# Altium PCB PCB3.pcbdoc (part 2 of 2)
Units mil, origin at the board's own origin, x right, y up, seen from the top; angles counter-clockwise.
Board outline 2519.61 x 1574.8 mil, 4 copper layers (Top Layer, Inner1, Inner2, Bottom Layer), stack 62.447 mil thick; 73 components, 68 nets, 329 pads, 85 vias.
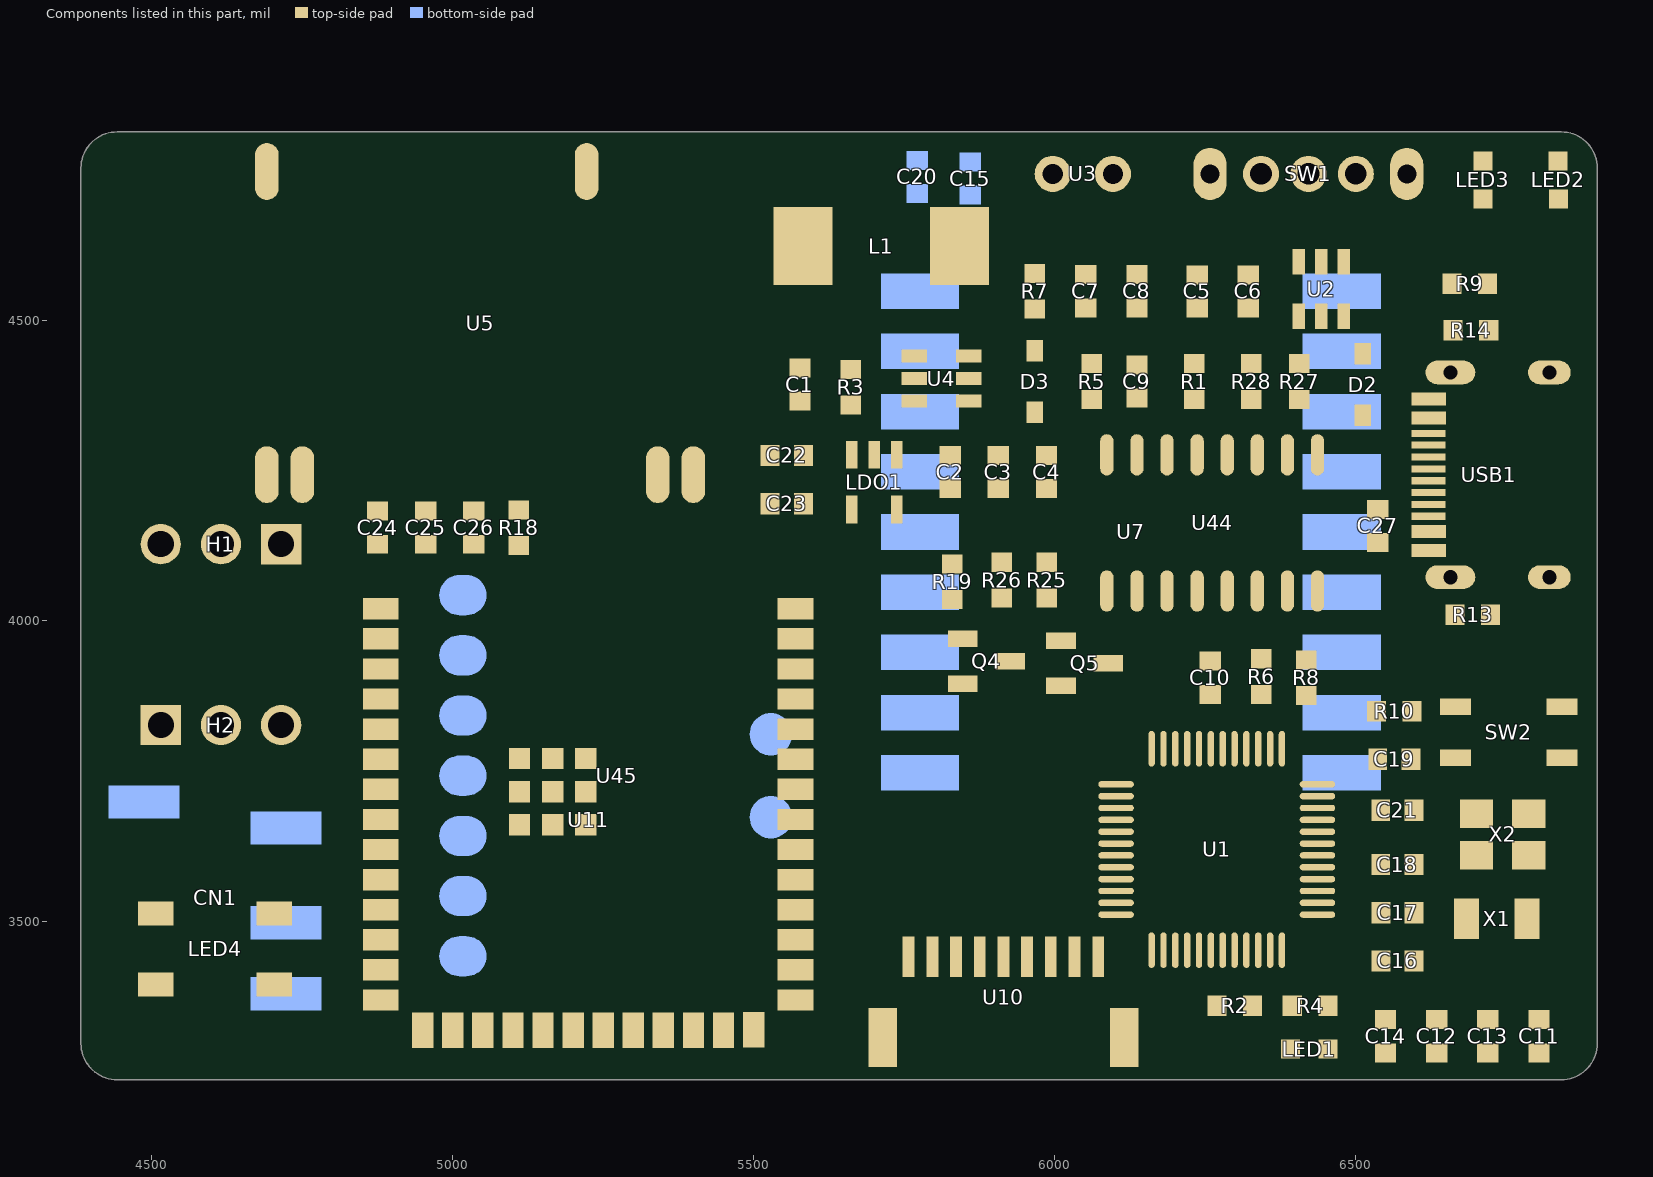
[diagram p4: the components of this part, seen from the top]

## Other copper
Top Layer:
  region net 5V: 5763.93,4261.24 5763.93,4291.24 ccw(c5808.93,6665.53) 5808.93,4290.82 5808.93,4259.32 ccw(c5763.93,3733.6)
  region net 3V3: 5926.3,4204.95 5926.3,4234.95 ccw(c5926.3,5450.18) 5968.93,4235.7 5968.93,4204.2 ccw(c5926.3,2989.71)
  region net ELEC: 6281.55,3862.07 6272.51,3856.96 ccw(c6256.6,3835.75) 6256.6,3862.27 6276.24,3877.98 ccw(c6302.76,3877.98)
  region net 3V3: 6742.28,3322.56 6742.28,3352.56 ccw(c6742.28,4706.54) 6787.28,3353.31 6787.28,3321.81 ccw(c6742.28,1968.58)
  region net 3V3: 6572.28,3322.56 6572.28,3352.56 ccw(c6572.28,4706.54) 6617.28,3353.31 6617.28,3321.81 ccw(c6572.28,1968.58)
  region net 3V3: 6697.72,3352.56 6697.72,3322.56 ccw(c6697.72,1968.58) 6652.72,3321.81 6652.72,3353.31 ccw(c6697.72,4706.54)
  region net 3V3: 6657.28,3322.56 6657.28,3352.56 ccw(c6657.28,4706.54) 6702.28,3353.31 6702.28,3321.81 ccw(c6657.28,1968.58)
  region net 3V3: 6782.72,3352.56 6782.72,3322.56 ccw(c6782.72,1968.58) 6737.72,3321.81 6737.72,3353.31 ccw(c6782.72,4706.54)
  region net 3V3: 6612.72,3352.56 6612.72,3322.56 ccw(c6612.72,1968.58) 6567.72,3321.81 6567.72,3353.31 ccw(c6612.72,4706.54)
  region net OSC32IN: 6563.49,3421.02 6558.39,3411.98 ccw(c6542.48,3390.77) 6542.48,3417.28 6558.19,3436.93 ccw(c6584.7,3436.93)
  region net OSC32IN: 6525,3430 6525,3440 ccw(c6509.22,3447.5) 6526.69,3447.5 6526.69,3422.5 ccw(c6509.22,3422.5)
  region net OSC32OT: 6521.39,3533.79 6531.3,3538.02 ccw(c6547.21,3559.23) 6547.21,3532.72 6526.69,3517.88 ccw(c6500.18,3517.88)
  region net OSC32OT: 6563.49,3501.02 6558.39,3491.98 ccw(c6542.48,3470.77) 6542.48,3497.28 6558.19,3516.93 ccw(c6584.7,3516.93)
  region net OSCIN: 6511.23,3585.75 6511.23,3595.75 ccw(c6511.23,3614.5) 6526.23,3603.25 6526.23,3578.25 ccw(c6511.23,3567)
  region net OSCIN: 6557.92,3618.3 6563.03,3609.26 ccw(c6584.24,3593.35) 6557.72,3593.35 6542.01,3612.99 ccw(c6542.01,3639.51)
  region net RST32: 6521.03,3747.26 6515.92,3756.3 ccw(c6494.71,3772.21) 6521.23,3772.21 6536.94,3752.56 ccw(c6536.94,3726.04)
  region net RST32: 6529.88,3802.99 6539.88,3802.99 ccw(c6558.63,3802.99) 6547.38,3787.99 6522.38,3787.99 ccw(c6511.13,3802.99)
  region net RST32: 6558.03,3756.3 6552.92,3747.26 ccw(c6537.01,3726.04) 6537.01,3752.56 6552.72,3772.21 ccw(c6579.24,3772.21)
  region net OSCOT: 6563.03,3671.3 6557.92,3662.26 ccw(c6542.01,3641.04) 6542.01,3667.56 6557.72,3687.21 ccw(c6584.24,3687.21)
  region net OSCOT: 6546.98,3666.98 6536.98,3666.98 ccw(c6529.48,3619.12) 6529.48,3667.56 6554.48,3667.56 ccw(c6554.48,3619.12)
  region net 3V3: 5494.78,4304.01 5514.02,4327.19 ccw(c5735.24,4484.77) 5543.19,4292.72 5511.69,4257.28 ccw(c5438.7,4257.28)
  region net 3V3: 5542.44,4212.28 5512.44,4212.28 ccw(c4158.46,4212.28) 5511.69,4257.28 5543.19,4257.28 ccw(c6896.42,4212.28)
  region net 3V3: 5512.44,4257.72 5542.44,4257.72 ccw(c6896.42,4257.72) 5543.19,4212.72 5511.69,4212.72 ccw(c4158.46,4257.72)
  region net RST: 5040,4096.69 5030,4096.69 ccw(c5011.25,4096.69) 5022.5,4111.69 5047.5,4111.69 ccw(c5058.75,4096.69)
  region net RST: 5067.72,4132.44 5067.72,4122.44 ccw(c5067.72,4103.69) 5052.72,4114.94 5052.72,4139.94 ccw(c5067.72,4151.19)
  region net 5V: 6568.82,4119.54 6547.61,4098.33 ccw(c6503.81,4054.53) 6519.14,4114.55 6554.58,4146.04 ccw(c6605.76,4156.48)
  region net $1N3930: 6501.86,4395.37 6531.86,4395.37 ccw(c6632.82,4359.39) 6525.64,4359.39 6498.08,4359.39 ccw(c6328.68,4395.37)
  region net VBUS: 6544.37,4459.03 6544.37,4429.03 ccw(c6544.37,4363.08) 6525.64,4426.32 6525.64,4461.75 ccw(c6544.37,4524.98)
  region net SD: 4683.14,4088.89 4676.07,4095.96 ccw(c4654.86,4111.87) 4681.37,4111.87 4699.05,4094.19 ccw(c4699.05,4067.67)
  region net WS: 4650.74,3798.2 4643.66,3791.13 4641.74,3792.89 4639.92,3794.23 4638.19,3795.21 4636.51,3795.85 4634.87,3796.22 4633.25,3796.33 4631.62,3796.25 4629.97,3796.01 4626.48,3795.23 4622.6,3794.34 4618.17,3793.68 4615.69,3793.54 4613,3793.59 4648.27,3828.86 4648.32,3826.17 4648.18,3823.69 4647.52,3819.26 4646.63,3815.39 4645.85,3811.89 4645.61,3810.24 4645.53,3808.61 4645.65,3806.99 4646.01,3805.35 4646.65,3803.67 4647.63,3801.94 4648.97,3800.12
  region net SCK: 4743.66,3862.87 4750.74,3855.8 4748.97,3853.88 4747.63,3852.06 4746.65,3850.33 4746.01,3848.65 4745.65,3847.01 4745.53,3845.39 4745.61,3843.76 4745.85,3842.11 4746.63,3838.61 4747.52,3834.74 4748.18,3830.31 4748.32,3827.83 4748.27,3825.14 4713,3860.41 4715.69,3860.46 4718.17,3860.32 4722.6,3859.66 4726.48,3858.77 4729.97,3857.99 4731.62,3857.75 4733.25,3857.67 4734.87,3857.78 4736.51,3858.15 4738.19,3858.79 4739.92,3859.77 4741.74,3861.11
  region net 5V: 5792.45,4291.24 5792.45,4261.24 ccw(c5792.45,4127.14) 5747.45,4253.47 5747.45,4299.02 ccw(c5792.45,4425.35)
  region net $1N3871: 6366.44,3315.96 6384.38,3312.16 ccw(c6406.46,3334.24) 6397.7,3304.27 6375.96,3304.27 ccw(c6314.03,3263.55)
  region net WSDIN: 4747.95,3519.05 4747.95,3509.05 ccw(c4747.95,3490.3) 4732.95,3501.55 4732.95,3526.55 ccw(c4747.95,3537.8)
  region net $1N5117: 5862.09,3991.92 5880.83,3996.52 ccw(c5911.72,3965.63) 5872.1,3984.03 5848.77,3984.03 ccw(c5840.01,4014)
  region net DTR: 5807.88,3890.45 5807.88,3900.45 ccw(c5807.88,3919.2) 5822.88,3907.95 5822.88,3882.95 ccw(c5807.88,3871.7)
  region net IO0: 5886.62,3930 5886.62,3940 ccw(c5886.62,3960.28) 5901.62,3946.63 5901.62,3922.5 ccw(c5886.62,3911.25)
  region net $1N5118: 6005.63,3996.18 6015.63,3996.18 ccw(c6034.38,3996.18) 6023.13,3981.18 5998.13,3981.18 ccw(c5986.88,3996.18)
  region net RTS: 5990.6,3919.7 6010.17,3914.27 ccw(c6032.25,3936.35) 6023.49,3906.38 5998.49,3906.38 ccw(c5968.52,3897.62)
  region net RTS: 6050.24,3897.6 6050.24,3887.6 ccw(c6050.24,3868.85) 6035.24,3880.1 6035.24,3905.1 ccw(c6050.24,3916.35)
  region net RST: 6059.46,3948.47 6072.99,3949.08 ccw(c6088.9,3970.3) 6088.9,3943.78 6064.76,3932.56 ccw(c6038.25,3932.56)
  region net LED: 6239,3355 6239,3365 ccw(c6239,3383.75) 6254,3372.5 6254,3347.5 ccw(c6239,3336.25)
  region net $1N3871: 6350.37,3346.17 6344.44,3337.96 ccw(c6328.53,3316.75) 6328.53,3343.27 6345.07,3362.08 ccw(c6371.59,3362.08)
  region net $1N3986: 5676.65,4297.65 5646.65,4297.65 ccw(c5141.41,4297.65) 5644.64,4342.65 5678.66,4342.65 ccw(c6181.89,4297.65)
  region net 5V: 5682.29,4459.71 5704.64,4439.63 ccw(c5794.32,4349.95) 5678.66,4401.97 5644.64,4433.72 ccw(c5592.62,4549.38)
  region net BOOT0: 6373.7,3374.38 6379.64,3382.59 ccw(c6395.55,3403.8) 6395.55,3377.28 6379,3358.47 ccw(c6352.48,3358.47)
  region net GND: 6433.02,3370.98 6435.56,3382.59 ccw(c6451.47,3403.8) 6451.47,3377.28 6438.32,3355.07 ccw(c6411.8,3355.07)
  region net ELEC: 6329.56,3856.76 6321.35,3862.7 ccw(c6300.14,3878.61) 6326.66,3878.61 6345.47,3862.06 ccw(c6345.47,3835.55)
  region net ELEC: 6375.67,3882.94 6375.67,3872.94 ccw(c6375.67,3854.19) 6360.67,3865.44 6360.67,3890.44 ccw(c6375.67,3901.69)
  region net ELEC: 6386.52,3872.94 6386.52,3882.94 ccw(c6386.52,3901.69) 6401.52,3890.44 6401.52,3865.44 ccw(c6386.52,3854.19)
  region net RST32: 6539.88,3818.27 6529.88,3818.27 ccw(c6511.13,3818.27) 6522.38,3833.27 6547.38,3833.27 ccw(c6558.63,3818.27)
  region net $1N3927: 6719.66,4042.01 6729.66,4042.01 ccw(c6748.41,4042.01) 6737.16,4027.01 6712.16,4027.01 ccw(c6700.91,4042.01)
  region net $1N3925: 6726.52,4450.85 6716.52,4450.85 ccw(c6697.77,4450.85) 6709.02,4465.85 6734.02,4465.85 ccw(c6745.27,4450.85)
  region net RST: 5077.99,4122.44 5077.99,4132.44 ccw(c5077.99,4151.19) 5092.99,4139.94 5092.99,4114.94 ccw(c5077.99,4103.69)
  region net RST: 5142.01,4130.34 5142.01,4120.34 ccw(c5142.01,4101.59) 5127.01,4112.84 5127.01,4137.84 ccw(c5142.01,4149.09)
  region net IO0: 5815.89,4014.16 5807.69,4020.1 ccw(c5786.48,4036.01) 5812.99,4036.01 5831.8,4019.46 ccw(c5831.8,3992.95)
  region net DTR: 5964.55,4112.75 5972.75,4118.69 ccw(c5988.66,4139.9) 5988.66,4113.39 5969.85,4096.84 ccw(c5943.34,4096.84)
  region net $1N5118: 6009.17,4022.95 6000.97,4017.01 ccw(c5985.06,3995.8) 5985.06,4022.32 6003.87,4038.86 ccw(c6030.38,4038.86)
  region net RTS: 5934.17,4082.27 5925.97,4076.33 ccw(c5910.06,4055.12) 5910.06,4081.64 5928.87,4098.18 ccw(c5955.38,4098.18)
  region net $1N5117: 5901.32,4017.01 5889.55,4019.38 ccw(c5868.34,4035.29) 5894.85,4035.29 5917.23,4022.32 ccw(c5917.23,3995.8)
  region net $1N4934: 6392.75,4347.01 6384.55,4352.95 ccw(c6363.34,4368.86) 6389.85,4368.86 6408.66,4352.32 ccw(c6408.66,4325.8)
  region net $1N4935: 6341.86,4337.32 6331.86,4337.32 ccw(c6313.11,4337.32) 6324.36,4352.32 6343.87,4352.32 ccw(c6398.89,4337.32)
  region net RST32: 6651.35,3751.28 6632.13,3746.19 ccw(c6607.21,3771.11) 6640.36,3759.17 6664.67,3759.17 ccw(c6673.43,3729.2)
  region net 3V3: 6397.64,3667.88 6397.64,3677.88 6400.4,3677.74 6403.01,3677.4 6407.58,3676.34 6410.93,3675.28 6412.64,3674.8 6412.64,3664.17 6410.93,3664.75 6407.58,3666.02 6405.42,3666.7 6403.01,3667.3 6400.4,3667.72
  region net BT-RX: 6397.64,3723.55 6397.64,3733.55 6407.58,3733.7 6412.64,3733.86 6412.64,3723.23 6407.58,3723.39
  region net ELEC: 6274.38,3826.81 6284.38,3826.81 6284.53,3816.87 6284.69,3811.81 6274.06,3811.81 6274.22,3816.87
  region net 3V3: 6166.6,3748.38 6156.6,3748.38 6156.5,3753.75 6156.28,3758.32 6155.95,3763.38 6166.58,3763.38
  region net SWDO: 6063,3549.77 6063,3559.77 6065.76,3559.63 6068.37,3559.29 6072.94,3558.23 6076.29,3557.17 6078,3556.69 6078,3546.06 6076.29,3546.64 6072.94,3547.91 6070.78,3548.59 6068.37,3549.19 6065.76,3549.61
  region net 3V3: 6137.84,3527.13 6139.59,3514.74 6136.64,3511.78 6135.16,3510.42 6133.64,3509.21 6132.03,3508.18 6130.32,3507.38 6128.46,3506.87 6126.43,3506.69 6126.43,3517.32 6128.71,3517.54 6130.45,3518.16 6131.79,3519.13 6132.89,3520.38 6134.96,3523.53 6136.22,3525.3
  region net SCLK: 6166.27,3413.74 6156.27,3413.74 6156.11,3423.68 6155.95,3428.74 6166.58,3428.74 6166.42,3423.68
  region net LED: 6205.64,3413.74 6195.64,3413.74 6195.48,3423.68 6195.32,3428.74 6205.95,3428.74 6205.79,3423.68
  region net BOOT0: 6304.07,3415.93 6294.07,3415.93 6293.91,3424.37 6293.75,3428.74 6304.38,3428.74 6304.22,3424.37
  region net GND: 6366.51,3421.99 6356.51,3421.99 6356.35,3423.21 6355.93,3424.33 6355.33,3425.35 6354.65,3426.26 6353.38,3427.74 6352.96,3428.3 6352.8,3428.74 6363.43,3428.74 6363.56,3428.3 6363.91,3427.74 6364.97,3426.26 6366.03,3424.33 6366.37,3423.21
  region net 3V3: 6362.69,3488.58 6375.07,3490.33 6378.03,3487.38 6379.39,3485.9 6380.61,3484.38 6381.63,3482.77 6382.43,3481.06 6382.94,3479.2 6383.12,3477.17 6372.49,3477.17 6372.27,3479.45 6371.65,3481.19 6370.68,3482.53 6369.43,3483.63 6366.29,3485.7 6364.51,3486.96
  region net 3V3: 5364.19,4330.4 5385.4,4309.19 ccw(c5463.51,4231.08) 5360.35,4270.59 5340.67,4290.28 ccw(c5275.55,4355.4)
  region net TX1: 5909.99,3490.39 5919.99,3490.39 ccw(c5945.65,3490.39) 5924.84,3475.39 5905.15,3475.39 ccw(c5884.34,3490.39)
  region net RX1: 5870.62,3490.39 5880.62,3490.39 ccw(c5906.28,3490.39) 5885.47,3475.39 5865.78,3475.39 ccw(c5844.97,3490.39)
  region net SWDO: 5791.89,3490.39 5801.89,3490.39 ccw(c5827.54,3490.39) 5806.73,3475.39 5787.04,3475.39 ccw(c5766.23,3490.39)
  region net SCLK: 5841.26,3403.74 5831.26,3403.74 ccw(c5826.41,3403.62) 5826.41,3408.47 5846.1,3408.47 ccw(c5846.1,3403.62)
  region net $1N4934: 6381.86,4314.27 6391.86,4314.27 6392.12,4311.51 6392.8,4308.9 6393.77,4306.49 6394.87,4304.33 6396.94,4300.98 6397.62,4299.89 6397.88,4299.27 6375.84,4299.27 6376.1,4299.89 6376.78,4300.98 6378.85,4304.33 6379.95,4306.49 6380.92,4308.9 6381.6,4311.51
  region net $1N4935: 6331.86,4314.27 6341.86,4314.27 6342.12,4311.51 6342.8,4308.9 6343.77,4306.49 6344.87,4304.33 6346.94,4300.98 6347.62,4299.89 6347.88,4299.27 6325.84,4299.27 6326.1,4299.89 6326.78,4300.98 6328.85,4304.33 6329.95,4306.49 6330.92,4308.9 6331.6,4311.51
  region net USB_D+: 6240,4235.76 6230,4239.48 6229.77,4242.04 6229.19,4244.02 6228.39,4245.62 6227.51,4247.02 6226.69,4248.41 6226.07,4250 6225.79,4251.95 6225.99,4254.48 6247.73,4250.76 6247.4,4249.31 6246.98,4248.07 6245.92,4246.09 6244.66,4244.58 6243.33,4243.3 6242.07,4242.02 6241.01,4240.49 6240.59,4239.56 6240.27,4238.48 6240.07,4237.22
  region net USB_D-: 6190,4235.76 6180,4239.48 6179.77,4242.04 6179.19,4244.02 6178.39,4245.62 6177.51,4247.02 6176.69,4248.41 6176.07,4250 6175.79,4251.95 6175.99,4254.48 6197.73,4250.76 6197.4,4249.31 6196.98,4248.07 6195.92,4246.09 6194.66,4244.58 6193.33,4243.3 6192.07,4242.02 6191.01,4240.49 6190.59,4239.56 6190.27,4238.48 6190.07,4237.22
  region net 5V: 6464.23,4098.34 6473.14,4064.82 6468.43,4060.28 6463.86,4056.01 6459.6,4051.84 6455.77,4047.59 6454.08,4045.39 6452.54,4043.1 6451.2,4040.71 6450.05,4038.19 6449.13,4035.53 6448.45,4032.69 6448.03,4029.67 6447.88,4026.44 6425.84,4073.09 6425.92,4074.33 6426.16,4075.5 6426.56,4076.62 6427.09,4077.68 6428.56,4079.64 6430.49,4081.41 6432.81,4083.03 6435.45,4084.51 6438.35,4085.9 6441.43,4087.21 6447.86,4089.71 6454.18,4092.26 6457.12,4093.61 6459.82,4095.06 6462.21,4096.63
  region net RTS: 6341.86,4011.44 6331.86,4011.44 6331.6,4014.19 6330.92,4016.8 6329.95,4019.21 6328.85,4021.37 6326.78,4024.73 6326.1,4025.81 6325.84,4026.44 6347.88,4026.44 6347.62,4025.81 6346.94,4024.73 6344.87,4021.37 6343.77,4019.21 6342.8,4016.8 6342.12,4014.19
  region net DTR: 6267.94,4066.06 6264.84,4083.31 6266.84,4081.04 6268.8,4078.42 6272.33,4073.39 6273.76,4071.62 6274.35,4071.06 6274.86,4070.77 6275.28,4070.79 6275.58,4071.16 6275.77,4071.91 6275.84,4073.09 6275.84,4052.74 6275.66,4054.75 6275.16,4056.62 6274.38,4058.36 6273.37,4060.01 6272.18,4061.58 6270.84,4063.1
  region net $1N3927: 6665,4198.64 6665,4188.64 ccw(c6665,4063.95) 6650,4187.74 6650,4199.55 ccw(c6665,4323.34)
  region net USB_D-: 6587.07,4207.93 6587.07,4217.93 ccw(c6587.07,4231.69) 6592.91,4219.23 6592.91,4207.42 ccw(c6587.07,4174.35)
  region net USB_D+: 6662.93,4237.93 6662.93,4227.93 ccw(c6662.93,4125.7) 6650,4227.11 6650,4238.92 ccw(c6662.93,4322.94)
  region net USB_D+: 6662.62,4277.38 6662.62,4267.38 ccw(c6662.62,4178.97) 6650,4266.48 6650,4278.29 ccw(c6662.62,4365.8)
  region net $1N3925: 6665,4316.75 6665,4306.75 ccw(c6665,4182.06) 6650,4305.85 6650,4317.66 ccw(c6665,4441.45)
  region net OSC32IN: 6750.74,3464.21 6756.17,3483.79 ccw(c6734.09,3505.86) 6764.07,3497.11 6764.07,3472.11 ccw(c6772.82,3442.13)
  region net OSCIN: 6658.67,3625 6658.67,3635 ccw(c6673.67,3838.53) 6673.67,3634.45 6673.67,3617.5 ccw(c6658.67,3606.25)
  region net OSCOT: 6754.98,3705.52 6765.99,3708.65 ccw(c6781.9,3729.86) 6781.9,3703.35 6760.28,3689.61 ccw(c6733.76,3689.61)
  region net RST: 4909.24,3943.21 4915.34,3935.18 ccw(c4936.55,3919.27) 4910.04,3919.27 4893.33,3937.91 ccw(c4893.33,3964.43)
  region net SCK: 4835.98,3865.2 4835.98,3875.2 ccw(c4835.98,3893.95) 4850.98,3882.7 4850.98,3857.7 ccw(c4835.98,3846.45)
  region net WS: 4835.98,3815.2 4835.98,3825.2 ccw(c4835.98,3843.95) 4850.98,3832.7 4850.98,3807.7 ccw(c4835.98,3796.45)
  region net SD: 4850.42,3747.18 4845.68,3756.58 ccw(c4824.47,3772.49) 4850.98,3772.49 4866.33,3752.48 ccw(c4866.33,3725.96)
  region net DIN: 4925.04,3675.2 4925.04,3665.2 ccw(c4925.04,3646.45) 4910.04,3657.7 4910.04,3682.7 ccw(c4925.04,3693.95)
  region net BCLK: 4925.04,3625.2 4925.04,3615.2 ccw(c4925.04,3596.45) 4910.04,3607.7 4910.04,3632.7 ccw(c4925.04,3643.95)
  region net LRC: 4917.93,3563.28 4922.92,3544.15 ccw(c4897.08,3518.31) 4910.04,3552.48 4910.04,3576.6 ccw(c4940.01,3585.36)
  region net WSDIN: 4835.98,3509.05 4835.98,3519.05 ccw(c4835.98,3537.8) 4850.98,3526.55 4850.98,3502.48 ccw(c4835.98,3488.64)
  region net AI1: 5614.02,3475.2 5614.02,3465.2 ccw(c5614.02,3446.45) 5599.02,3457.7 5599.02,3482.7 ccw(c5614.02,3493.95)
  region net AI2: 5614.02,3525.2 5614.02,3515.2 ccw(c5614.02,3496.45) 5599.02,3507.7 5599.02,3532.7 ccw(c5614.02,3543.95)
  region net AI3: 5614.02,3675.2 5614.02,3665.2 ccw(c5614.02,3646.45) 5599.02,3657.7 5599.02,3682.7 ccw(c5614.02,3693.95)
  region net AI4: 5614.02,3723.86 5614.02,3713.86 ccw(c5614.02,3695.11) 5599.02,3706.36 5599.02,3731.36 ccw(c5614.02,3742.61)
  region net AI5: 5614.02,3775.2 5614.02,3765.2 ccw(c5614.02,3746.45) 5599.02,3757.7 5599.02,3782.7 ccw(c5614.02,3793.95)
  region net TX1: 5919.99,3503.59 5909.99,3503.59 5909.91,3504.71 5909.66,3505.84 5908.76,3508.07 5907.5,3510.17 5906.04,3511.99 5923.95,3511.99 5922.49,3510.17 5921.23,3508.07 5920.33,3505.84 5920.08,3504.71
  region net RX1: 5880.62,3483.59 5870.62,3483.59 5870.54,3484.71 5870.29,3485.84 5869.39,3488.07 5868.13,3490.17 5866.67,3491.99 5884.58,3491.99 5883.12,3490.17 5881.86,3488.07 5880.96,3485.84 5880.71,3484.71
  region net RX1: 5951.41,3615 5951.41,3605 5950.29,3604.91 5949.16,3604.66 5946.93,3603.77 5944.83,3602.5 5943.01,3601.05 5943.01,3618.95 5944.83,3617.5 5946.93,3616.23 5949.16,3615.34 5950.29,3615.09
  region net DIN: 5001.76,3651.17 5009.04,3658.03 5009.9,3657.3 5010.87,3656.67 5013.06,3655.72 5015.42,3655.12 5017.73,3654.83 5004.86,3642.39 5004.62,3644.71 5004.05,3647.1 5003.11,3649.33 5002.49,3650.31
  region net BCLK: 4999.86,3548.07 5006.93,3555.14 5007.79,3554.41 5008.76,3553.79 5010.98,3552.84 5013.35,3552.26 5015.67,3551.99 5003.01,3539.33 5002.74,3541.65 5002.16,3544.02 5001.21,3546.24 5000.59,3547.21
  region net LRC: 5010,3459.14 5020,3459.14 5020.09,3458.12 5020.34,3457.24 5020.73,3456.48 5021.23,3455.79 5023.95,3453.01 5006.05,3453.01 5008.77,3455.79 5009.27,3456.48 5009.66,3457.24 5009.91,3458.12
  region net DTR: 6101.41,4110 6101.41,4100 6100.29,4099.91 6099.16,4099.66 6096.93,4098.77 6094.83,4097.5 6093.01,4096.05 6093.01,4113.95 6094.83,4112.5 6096.93,4111.23 6099.16,4110.34 6100.29,4110.09
  region net BT-RX: 6396.41,3733.55 6396.41,3723.55 6395.29,3723.46 6394.16,3723.21 6391.93,3722.31 6389.83,3721.05 6388.01,3719.6 6388.01,3737.5 6389.83,3736.05 6391.93,3734.78 6394.16,3733.89 6395.29,3733.63
  region net 3V3: 6329.99,3535.41 6322.92,3528.34 6322.06,3529.07 6321.09,3529.7 6318.88,3530.64 6316.5,3531.23 6314.18,3531.49 6326.84,3544.15 6327.11,3541.83 6327.69,3539.46 6328.64,3537.25 6329.26,3536.27
  region net 3V3: 6298.19,3538.82 6298.7,3548.82 6299.82,3548.91 6300.94,3549.15 6303.16,3550.02 6305.25,3551.25 6307.1,3552.65 6306.6,3534.76 6304.8,3536.25 6302.7,3537.55 6300.45,3538.47 6299.31,3538.73
  region net 3V3: 6309.85,3559.89 6319.85,3559.89 6319.94,3558.77 6320.19,3557.64 6321.09,3555.41 6322.35,3553.32 6323.8,3551.49 6305.9,3551.49 6307.35,3553.32 6308.62,3555.41 6309.51,3557.64 6309.76,3558.77
  region net 3V3: 5941.88,4234.95 5934.7,4204.95 5932.29,4205.08 5930.42,4205.28 5928.6,4205.25 5926.3,4204.68 5933.47,4220.65 5933.77,4220.22 5934.1,4220.23 5934.47,4220.64 5934.87,4221.37 5935.77,4223.6 5936.78,4226.46 5937.91,4229.48 5939.14,4232.21 5939.79,4233.32 5940.47,4234.19 5941.16,4234.75
  region net IO0: 5908.35,3930 5911.55,3940 5913.75,3940.27 5915.91,3940.97 5917.99,3941.96 5919.95,3943.09 5916.75,3925.48 5915.1,3927.14 5912.97,3928.59 5910.62,3929.61 5909.46,3929.9
  region net ELEC: 6254.99,3874.48 cw(c6201.78,3825.1) 6274.38,3825.1 6284.38,3822.17 cw(c6314.38,3822.17) 6314.38,3852.17 6311.45,3862.17 cw(c6311.45,3934.77) 6262.06,3881.55
  region net 3V3: 6196.6,3548.82 cw(c6196.6,3578.82) 6166.6,3578.82 6156.6,3575.89 cw(c6084.18,3575.89) 6135.39,3524.68 6142.46,3517.61 cw(c6193.67,3466.39) 6193.67,3538.82
Inner1:
  region net BT-RX: 4758.02,4248.03 4758.02,4238.03 4756.9,4237.94 4755.77,4237.69 4753.54,4236.8 4751.44,4235.53 4749.62,4234.08 4749.62,4251.98 4751.44,4250.53 4753.54,4249.27 4755.77,4248.37 4756.9,4248.12
  region net BT-TX: 4683.07,4260.14 4690.14,4253.07 4689.41,4252.21 4688.79,4251.24 4687.84,4249.02 4687.26,4246.65 4686.99,4244.33 4674.33,4256.99 4676.65,4257.26 4679.02,4257.84 4681.24,4258.79 4682.21,4259.41
  region net BT-TX: 6382.81,3826.64 6392.81,3826.64 6392.89,3825.51 6393.14,3824.38 6394.04,3822.15 6395.31,3820.06 6396.76,3818.23 6378.86,3818.23 6380.31,3820.06 6381.57,3822.15 6382.47,3824.38 6382.72,3825.51
  region net BT-RX: 6363.59,3723.55 6363.59,3733.55 6364.71,3733.63 6365.84,3733.89 6368.07,3734.78 6370.17,3736.05 6371.99,3737.5 6371.99,3719.6 6370.17,3721.05 6368.07,3722.31 6365.84,3723.21 6364.71,3723.46
  region net TXD: 6342,4403.84 6334.93,4396.77 6334.07,4397.5 6333.1,4398.12 6330.88,4399.07 6328.51,4399.65 6326.19,4399.92 6338.85,4412.58 6339.12,4410.26 6339.7,4407.89 6340.65,4405.68 6341.27,4404.7
  region net RXD: 6410.51,4401.73 6403.44,4394.66 6402.59,4395.39 6401.61,4396.01 6399.4,4396.96 6397.02,4397.54 6394.71,4397.81 6407.36,4410.46 6407.63,4408.15 6408.22,4405.77 6409.16,4403.56 6409.78,4402.58
  region net TXD: 5603.07,3875.14 5610.14,3868.07 5609.41,3867.21 5608.79,3866.24 5607.84,3864.02 5607.26,3861.65 5606.99,3859.33 5594.33,3871.99 5596.65,3872.26 5599.02,3872.84 5601.24,3873.79 5602.21,3874.41
  region net RXD: 5603.45,3825 5603.45,3815 5602.32,3814.91 5601.19,3814.66 5598.96,3813.77 5596.87,3812.5 5595.04,3811.05 5595.04,3828.95 5596.87,3827.5 5598.96,3826.23 5601.19,3825.34 5602.32,3825.09
  region net AS-RXD: 5639.86,3984.86 5632.79,3991.93 5633.52,3992.79 5634.14,3993.76 5635.09,3995.98 5635.67,3998.35 5635.94,4000.67 5648.6,3988.01 5646.28,3987.74 5643.9,3987.16 5641.69,3986.21 5640.72,3985.59
  region net AS-TXD: 5496.93,3989.86 5489.86,3996.93 5490.59,3997.79 5491.21,3998.76 5492.16,4000.98 5492.74,4003.35 5493.01,4005.67 5505.67,3993.01 5503.35,3992.74 5500.98,3992.16 5498.76,3991.21 5497.79,3990.59
  region net AS-RXD: 5973.59,3450 5973.59,3460 5974.71,3460.09 5975.84,3460.34 5978.07,3461.23 5980.17,3462.5 5981.99,3463.95 5981.99,3446.05 5980.17,3447.5 5978.07,3448.77 5975.84,3449.66 5974.71,3449.91
  region net AS-TXD: 5948.54,3396.46 5941.46,3403.54 5942.13,3404.32 5942.57,3405.12 5942.83,3405.93 5942.96,3406.78 5943.01,3410.67 5955.67,3398.01 5951.78,3397.96 5950.93,3397.83 5950.12,3397.57 5949.32,3397.13
Inner2:
  region net BAT: 6358.12,4701.85 6328.12,4701.85 6327.98,4704.39 6327.57,4707.16 6326.91,4710.05 6326.04,4712.96 6324.96,4715.8 6323.71,4718.46 6322.3,4720.85 6320.76,4722.85 6365.48,4722.85 6363.94,4720.85 6362.53,4718.46 6361.28,4715.8 6360.2,4712.96 6359.33,4710.05 6358.67,4707.16 6358.26,4704.39
  region net BAT: 6111.86,4701.85 6081.86,4701.85 6081.72,4704.39 6081.31,4707.16 6080.65,4710.05 6079.78,4712.96 6078.7,4715.8 6077.45,4718.46 6076.04,4720.85 6074.5,4722.85 6119.22,4722.85 6117.68,4720.85 6116.27,4718.46 6115.02,4715.8 6113.94,4712.96 6113.07,4710.05 6112.41,4707.16 6112,4704.39
  region net BAT: 6241.66,4591.75 6264.23,4571.9 6263.43,4571.37 6262.49,4571.17 6261.42,4571.25 6260.26,4571.56 6257.77,4572.68 6255.23,4574.12 6252.88,4575.49 6250.92,4576.38 6250.16,4576.53 6249.58,4576.41 6249.21,4575.97 6249.08,4575.16 6234.57,4586.95 6236.61,4587.66 6238.42,4588.8 6240.07,4590.2
  region net BAT: 6328.12,4742.85 cw(c6105.86,4773.19) 6264.48,4614.58 6279.48,4587.15 cw(c6344.41,4522.22) 6395.16,4598.75 6416.37,4619.96 cw(c6559.45,4763.04) 6358.12,4742.85
Bottom Layer:
  region net $1N3970: 5865,4676.69 5855,4676.69 ccw(c5836.25,4676.69) 5847.5,4691.69 5872.5,4691.69 ccw(c5883.75,4676.69)
  region net SPK-: 4491.89,3656.89 4481.89,3656.89 ccw(c4463.14,3656.89) 4474.39,3671.89 4499.39,3671.89 ccw(c4510.64,3656.89)
  region net MIC+: 4751.49,3691.59 4771.06,3697.02 ccw(c4793.14,3674.94) 4763.17,3683.7 4738.17,3683.7 ccw(c4729.41,3713.67)
  region net SPK+: 4751.49,3534.11 4771.06,3539.54 ccw(c4793.14,3517.46) 4763.17,3526.22 4738.17,3526.22 ccw(c4729.41,3556.19)
  region net MIC-: 4797.16,3385.55 4797.16,3375.55 ccw(c4797.16,3356.8) 4782.16,3368.05 4782.16,3393.05 ccw(c4797.16,3404.3)
  region net AS-TXD: 5696.51,4342.85 5696.51,4352.85 ccw(c5696.51,4371.6) 5711.51,4360.35 5711.51,4335.35 ccw(c5696.51,4324.1)
  region net AS-RXD: 5696.51,4242.85 5696.51,4252.85 ccw(c5696.51,4271.6) 5711.51,4260.35 5711.51,4235.35 ccw(c5696.51,4224.1)
  region net MIC+: 5730.79,3886.46 5746.12,3885.27 ccw(c5768.2,3907.35) 5759.44,3877.38 5734.44,3877.38 ccw(c5721.96,3877.63)
  region net MIC-: 5746.12,3710.43 5726.55,3705 ccw(c5704.47,3727.08) 5734.44,3718.33 5759.44,3718.33 ccw(c5768.2,3688.35)
  region net TX: 6397.29,4342.85 6397.29,4352.85 ccw(c6397.29,4371.6) 6412.29,4360.35 6412.29,4335.35 ccw(c6397.29,4324.1)
  region net RX: 6397.29,4442.85 6397.29,4452.85 ccw(c6397.29,4471.6) 6412.29,4460.35 6412.29,4435.35 ccw(c6397.29,4424.1)
  region net $1N3970: 6404.4,4568.53 6400.38,4586.69 ccw(c6444.32,4630.62) 6412.29,4577.38 6412.29,4555.21 ccw(c6382.32,4546.45)
  region net SPK-: 5498.16,3636.37 5491.09,3643.44 5492.65,3645.13 5494.08,3646.96 5495.32,3648.9 5496.29,3650.93 5496.95,3653.01 5497.22,3655.13 5497.06,3657.25 5496.39,3659.35 5514.07,3641.67 5511.97,3642.34 5509.85,3642.51 5507.73,3642.23 5505.65,3641.58 5503.62,3640.6 5501.68,3639.37 5499.85,3637.94
  region net SPK+: 5498.16,3774.16 5491.09,3781.24 5492.65,3782.93 5494.08,3784.76 5495.32,3786.7 5496.29,3788.72 5496.95,3790.81 5497.22,3792.93 5497.06,3795.05 5496.39,3797.15 5514.07,3779.47 5511.97,3780.14 5509.85,3780.3 5507.73,3780.03 5505.65,3779.37 5503.62,3778.4 5501.68,3777.16 5499.85,3775.73
  region net TX1: 5909.99,3536.41 5919.99,3536.41 5920.08,3535.29 5920.33,3534.16 5921.23,3531.93 5922.49,3529.83 5923.95,3528.01 5906.04,3528.01 5907.5,3529.83 5908.76,3531.93 5909.66,3534.16 5909.91,3535.29
  region net RX1: 5870.62,3516.41 5880.62,3516.41 5880.71,3515.29 5880.96,3514.16 5881.86,3511.93 5883.12,3509.83 5884.58,3508.01 5866.67,3508.01 5868.13,3509.83 5869.39,3511.93 5870.29,3514.16 5870.54,3515.29
  region net TX1: 6001.93,3617.85 5994.86,3624.92 5995.59,3625.78 5996.21,3626.76 5997.15,3628.97 5997.74,3631.34 5998.01,3633.66 6010.66,3621 6008.34,3620.74 6005.97,3620.15 6003.76,3619.21 6002.78,3618.58
  region net RX: 5163.41,3350 5170.3,3340 5167.41,3339.91 5166.06,3339.74 5164.83,3339.43 5163.76,3338.93 5162.88,3338.21 5162.25,3337.23 5161.9,3335.94 5150.66,3349.56 5154.11,3349.5 5157.03,3349.67 5159.95,3349.89
  region net TX: 5219.41,3300 5211.96,3290 5209.93,3289.87 5207.71,3289.54 5203.55,3288.53 5211.01,3304.8 5211.6,3303.77 5212.41,3302.83 5213.39,3302.01 5214.5,3301.32 5215.7,3300.76 5216.94,3300.34 5218.2,3300.09
  region net DTR: 6068.59,4100 6068.59,4110 6069.71,4110.09 6070.84,4110.34 6073.07,4111.23 6075.17,4112.5 6076.99,4113.95 6076.99,4096.05 6075.17,4097.5 6073.07,4098.77 6070.84,4099.66 6069.71,4099.91
  region net DTR: 6015.62,4110 6024.33,4100 6021.75,4099.7 6020.48,4099.33 6019.28,4098.81 6018.18,4098.15 6017.23,4097.33 6016.47,4096.36 6015.93,4095.23 6007.21,4110.87 6011.39,4110.25
  region net AS-RXD: 5642.93,4016.41 5652.93,4016.41 5653.02,4015.29 5653.27,4014.16 5654.16,4011.93 5655.43,4009.83 5656.88,4008.01 5638.98,4008.01 5640.43,4009.83 5641.69,4011.93 5642.59,4014.16 5642.84,4015.29
  region net AS-TXD: 5500,4021.41 5510,4021.41 5510.09,4020.29 5510.34,4019.16 5511.23,4016.93 5512.5,4014.83 5513.95,4013.01 5496.05,4013.01 5497.5,4014.83 5498.77,4016.93 5499.66,4019.16 5499.91,4020.29
  region net IO0: 5931.23,3916.44 5921.23,3916.44 5921.14,3917.56 5920.89,3918.69 5920,3920.93 5918.73,3923.02 5917.28,3924.85 5935.18,3924.85 5933.73,3923.02 5932.46,3920.93 5931.57,3918.69 5931.32,3917.56
  region net IO0: 5597.24,3384.31 5605.59,3378.52 5604.87,3377.66 5604.25,3376.65 5603.32,3374.34 5602.8,3371.87 5602.69,3369.53 5588.82,3380.84 5591.08,3381.28 5593.34,3381.96 5595.45,3382.94

## Silkscreen, mask and mechanical layers (free items; w line width, h text height)
Top Silkscreen Layer:
  drawing of 13 lines, arcs and shapes, not listed
  text "+     -" at 6110,4695 h30 r180
  text "GND VCC SD" at 4520,4035 h30
  text "GND WS SCK" at 4525,3885 h30
Bottom Silkscreen Layer:
  text "物联网应用技术毕业设计 / 《基于AI大模型的智能对话控制系统》 / 时间：       2026 / 班级：       物联2333 / 姓名：       王明轩" at 5460,4440 h60

## Dimensions
4334.62,4812.66 to 4334.62,3237.85 on Document Layer
6899.6,4862.35 to 4379.6,4852.35 on Document Layer

## Text inside footprints (layer, text, board x,y; h text height)
U5: Top Silkscreen Layer "RX" at 4785,4295 h60 r90; Top Silkscreen Layer "TX" at 4725,4290 h60 r90; Top Silkscreen Layer "3.3V" at 5370,4295 h60 r90; Top Silkscreen Layer "GND" at 5430,4295 h60 r90; Top Silkscreen Layer "LK-ST" at 5255,4515 h60 r90; Top Silkscreen Layer "NC" at 4720,4625 h60 r90